# EAGLE board TSOP_AND_SOP (EAGLE 4.09)

Size 160 x 100 mm. Coordinates in mm from the lower left corner, seen from the top.
Outline: 0,0 160,0 160,100 0,100 0,0
Copper layers used: 

## Footprints (pad centres in the part's own frame; a part is rotated, then mirrored left to right if it is on the bottom)
SO08 = smd 0.6 x 2.2: 1 -1.905,-2.6; 2 -0.635,-2.6; 3 0.635,-2.6; 4 1.905,-2.6; 5 1.905,2.6; 6 0.635,2.6; 7 -0.635,2.6; 8 -1.905,2.6
SO-08M = smd 0.6 x 2.2: 1 -1.905,-3.33; 2 -0.635,-3.33; 3 0.635,-3.33; 4 1.905,-3.33; 5 1.905,3.33; 6 0.635,3.33; 7 -0.635,3.33; 8 -1.905,3.33
SO-08 = smd 0.6 x 2.2: 1 -1.905,-2.6; 2 -0.635,-2.6; 3 0.635,-2.6; 4 1.905,-2.6; 5 1.905,2.6; 6 0.635,2.6; 7 -0.635,2.6; 8 -1.905,2.6
SO8 = smd 0.6 x 2.2: 1 -1.905,-2.6; 2 -0.635,-2.6; 3 0.635,-2.6; 4 1.905,-2.6; 5 1.905,2.6; 6 0.635,2.6; 7 -0.635,2.6; 8 -1.905,2.6
SO14 = smd 0.6 x 2.2: 1 -3.81,-2.6; 2 -2.54,-2.6; 3 -1.27,-2.6; 4 0,-2.6; 5 1.27,-2.6; 6 2.54,-2.6; 7 3.81,-2.6; 8 3.81,2.6; 9 2.54,2.6; 10 1.27,2.6; 11 0,2.6; 12 -1.27,2.6; 13 -2.54,2.6; 14 -3.81,2.6
SO16 = smd 0.6 x 2.2: 1 -4.445,-2.6; 2 -3.175,-2.6; 3 -1.905,-2.6; 4 -0.635,-2.6; 5 0.635,-2.6; 6 1.905,-2.6; 7 3.175,-2.6; 8 4.445,-2.6; 9 4.445,2.6; 10 3.175,2.6; 11 1.905,2.6; 12 0.635,2.6; 13 -0.635,2.6; 14 -1.905,2.6; 15 -3.175,2.6; 16 -4.445,2.6
SO16W = smd 0.6 x 2.2: 1 -4.445,-4.6; 2 -3.175,-4.6; 3 -1.905,-4.6; 4 -0.635,-4.6; 5 0.635,-4.6; 6 1.905,-4.6; 7 3.175,-4.6; 8 4.445,-4.6; 9 4.445,4.6; 10 3.175,4.6; 11 1.905,4.6; 12 0.635,4.6; 13 -0.635,4.6; 14 -1.905,4.6; 15 -3.175,4.6; 16 -4.445,4.6
SSOP56 = smd 0.45 x 1.8: 1 -10.8,-7.55; 2 -10,-7.55; 3 -9.2,-7.55; 4 -8.4,-7.55; 5 -7.6,-7.55; 6 -6.8,-7.55; 7 -6,-7.55; 8 -5.2,-7.55; 9 -4.4,-7.55; 10 -3.6,-7.55; 11 -2.8,-7.55; 12 -2,-7.55; 13 -1.2,-7.55; 14 -0.4,-7.55; 15 0.4,-7.55; 16 1.2,-7.55; 17 2,-7.55; 18 2.8,-7.55; 19 3.6,-7.55; 20 4.4,-7.55; 21 5.2,-7.55; 22 6,-7.55; 23 6.8,-7.55; 24 7.6,-7.55; 25 8.4,-7.55; 26 9.2,-7.55; 27 10,-7.55; 28 10.8,-7.55; 29 10.8,7.55; 30 10,7.55; 31 9.2,7.55; 32 8.4,7.55; 33 7.6,7.55; 34 6.8,7.55; 35 6,7.55; 36 5.2,7.55; 37 4.4,7.55; 38 3.6,7.55; 39 2.8,7.55; 40 2,7.55; 41 1.2,7.55; 42 0.4,7.55; 43 -0.4,7.55; 44 -1.2,7.55; 45 -2,7.55; 46 -2.8,7.55; 47 -3.6,7.55; 48 -4.4,7.55; 49 -5.2,7.55; 50 -6,7.55; 51 -6.8,7.55; 52 -7.6,7.55; 53 -8.4,7.55; 54 -9.2,7.55; 55 -10,7.55; 56 -10.8,7.55
SO20W = smd 0.6 x 2.2: 1 -5.715,-4.6; 2 -4.445,-4.6; 3 -3.175,-4.6; 4 -1.905,-4.6; 5 -0.635,-4.6; 6 0.635,-4.6; 7 1.905,-4.6; 8 3.175,-4.6; 9 4.445,-4.6; 10 5.715,-4.6; 11 5.715,4.6; 12 4.445,4.6; 13 3.175,4.6; 14 1.905,4.6; 15 0.635,4.6; 16 -0.635,4.6; 17 -1.905,4.6; 18 -3.175,4.6; 19 -4.445,4.6; 20 -5.715,4.6
SO24W = smd 0.6 x 2.2: 1 -6.985,-4.6; 2 -5.715,-4.6; 3 -4.445,-4.6; 4 -3.175,-4.6; 5 -1.905,-4.6; 6 -0.635,-4.6; 7 0.635,-4.6; 8 1.905,-4.6; 9 3.175,-4.6; 10 4.445,-4.6; 11 5.715,-4.6; 12 6.985,-4.6; 13 6.985,4.6; 14 5.715,4.6; 15 4.445,4.6; 16 3.175,4.6; 17 1.905,4.6; 18 0.635,4.6; 19 -0.635,4.6; 20 -1.905,4.6; 21 -3.175,4.6; 22 -4.445,4.6; 23 -5.715,4.6; 24 -6.985,4.6
SO28W = smd 0.6 x 2.2: 1 -8.255,-4.6; 2 -6.985,-4.6; 3 -5.715,-4.6; 4 -4.445,-4.6; 5 -3.175,-4.6; 6 -1.905,-4.6; 7 -0.635,-4.6; 8 0.635,-4.6; 9 1.905,-4.6; 10 3.175,-4.6; 11 4.445,-4.6; 12 5.715,-4.6; 13 6.985,-4.6; 14 8.255,-4.6; 15 8.255,4.6; 16 6.985,4.6; 17 5.715,4.6; 18 4.445,4.6; 19 3.175,4.6; 20 1.905,4.6; 21 0.635,4.6; 22 -0.635,4.6; 23 -1.905,4.6; 24 -3.175,4.6; 25 -4.445,4.6; 26 -5.715,4.6; 27 -6.985,4.6; 28 -8.255,4.6
SO-18DW = smd 0.6 x 2.2: 1 -5.08,-4.6; 2 -3.81,-4.6; 3 -2.54,-4.6; 4 -1.27,-4.6; 5 0,-4.6; 6 1.27,-4.6; 7 2.54,-4.6; 8 3.81,-4.6; 9 5.08,-4.6; 10 5.08,4.6; 11 3.81,4.6; 12 2.54,4.6; 13 1.27,4.6; 14 0,4.6; 15 -1.27,4.6; 16 -2.54,4.6; 17 -3.81,4.6; 18 -5.08,4.6
SOP32 = smd 0.6 x 2.2: 1 -9.525,-6.4; 2 -8.255,-6.4; 3 -6.985,-6.4; 4 -5.715,-6.4; 5 -4.445,-6.4; 6 -3.175,-6.4; 7 -1.905,-6.4; 8 -0.635,-6.4; 9 0.635,-6.4; 10 1.905,-6.4; 11 3.175,-6.4; 12 4.445,-6.4; 13 5.715,-6.4; 14 6.985,-6.4; 15 8.255,-6.4; 16 9.525,-6.4; 17 9.525,6.4; 18 8.255,6.4; 19 6.985,6.4; 20 5.715,6.4; 21 4.445,6.4; 22 3.175,6.4; 23 1.905,6.4; 24 0.635,6.4; 25 -0.635,6.4; 26 -1.905,6.4; 27 -3.175,6.4; 28 -4.445,6.4; 29 -5.715,6.4; 30 -6.985,6.4; 31 -8.255,6.4; 32 -9.525,6.4
TSOP32L = smd 1.6 x 0.3: 1 -9.6,3.75; 2 -9.6,3.25; 3 -9.6,2.75; 4 -9.6,2.25; 5 -9.6,1.75; 6 -9.6,1.25; 7 -9.6,0.75; 8 -9.6,0.25; 9 -9.6,-0.25; 10 -9.6,-0.75; 11 -9.6,-1.25; 12 -9.6,-1.75; 13 -9.6,-2.25; 14 -9.6,-2.75; 15 -9.6,-3.25; 16 -9.6,-3.75; 17 9.6,-3.75; 18 9.6,-3.25; 19 9.6,-2.75; 20 9.6,-2.25; 21 9.6,-1.75; 22 9.6,-1.25; 23 9.6,-0.75; 24 9.6,-0.25; 25 9.6,0.25; 26 9.6,0.75; 27 9.6,1.25; 28 9.6,1.75; 29 9.6,2.25; 30 9.6,2.75; 31 9.6,3.25; 32 9.6,3.75
TSOP32 = smd 1.2 x 0.36: 1 -9.85,3.75; 2 -9.85,3.25; 3 -9.85,2.75; 4 -9.85,2.25; 5 -9.85,1.75; 6 -9.85,1.25; 7 -9.85,0.75; 8 -9.85,0.25; 9 -9.85,-0.25; 10 -9.85,-0.75; 11 -9.85,-1.25; 12 -9.85,-1.75; 13 -9.85,-2.25; 14 -9.85,-2.75; 15 -9.85,-3.25; 16 -9.85,-3.75; 17 9.85,-3.75; 18 9.85,-3.25; 19 9.85,-2.75; 20 9.85,-2.25; 21 9.85,-1.75; 22 9.85,-1.25; 23 9.85,-0.75; 24 9.85,-0.25; 25 9.85,0.25; 26 9.85,0.75; 27 9.85,1.25; 28 9.85,1.75; 29 9.85,2.25; 30 9.85,2.75; 31 9.85,3.25; 32 9.85,3.75
TSOP48 = smd 1.6 x 0.3: 1 -9.6,5.75; 2 -9.6,5.25; 3 -9.6,4.75; 4 -9.6,4.25; 5 -9.6,3.75; 6 -9.6,3.25; 7 -9.6,2.75; 8 -9.6,2.25; 9 -9.6,1.75; 10 -9.6,1.25; 11 -9.6,0.75; 12 -9.6,0.25; 13 -9.6,-0.25; 14 -9.6,-0.75; 15 -9.6,-1.25; 16 -9.6,-1.75; 17 -9.6,-2.25; 18 -9.6,-2.75; 19 -9.6,-3.25; 20 -9.6,-3.75; 21 -9.6,-4.25; 22 -9.6,-4.75; 23 -9.6,-5.25; 24 -9.6,-5.75; 25 9.6,-5.75; 26 9.6,-5.25; 27 9.6,-4.75; 28 9.6,-4.25; 29 9.6,-3.75; 30 9.6,-3.25; 31 9.6,-2.75; 32 9.6,-2.25; 33 9.6,-1.75; 34 9.6,-1.25; 35 9.6,-0.75; 36 9.6,-0.25; 37 9.6,0.25; 38 9.6,0.75; 39 9.6,1.25; 40 9.6,1.75; 41 9.6,2.25; 42 9.6,2.75; 43 9.6,3.25; 44 9.6,3.75; 45 9.6,4.25; 46 9.6,4.75; 47 9.6,5.25; 48 9.6,5.75
TSOP48L = smd 1.6 x 0.3: 1 -9.6,5.75; 2 -9.6,5.25; 3 -9.6,4.75; 4 -9.6,4.25; 5 -9.6,3.75; 6 -9.6,3.25; 7 -9.6,2.75; 8 -9.6,2.25; 9 -9.6,1.75; 10 -9.6,1.25; 11 -9.6,0.75; 12 -9.6,0.25; 13 -9.6,-0.25; 14 -9.6,-0.75; 15 -9.6,-1.25; 16 -9.6,-1.75; 17 -9.6,-2.25; 18 -9.6,-2.75; 19 -9.6,-3.25; 20 -9.6,-3.75; 21 -9.6,-4.25; 22 -9.6,-4.75; 23 -9.6,-5.25; 24 -9.6,-5.75; 25 9.6,-5.75; 26 9.6,-5.25; 27 9.6,-4.75; 28 9.6,-4.25; 29 9.6,-3.75; 30 9.6,-3.25; 31 9.6,-2.75; 32 9.6,-2.25; 33 9.6,-1.75; 34 9.6,-1.25; 35 9.6,-0.75; 36 9.6,-0.25; 37 9.6,0.25; 38 9.6,0.75; 39 9.6,1.25; 40 9.6,1.75; 41 9.6,2.25; 42 9.6,2.75; 43 9.6,3.25; 44 9.6,3.75; 45 9.6,4.25; 46 9.6,4.75; 47 9.6,5.25; 48 9.6,5.75
TSOP56 = smd 1.2 x 0.25: 1 -9.7,6.75; 2 -9.7,6.25; 3 -9.7,5.75; 4 -9.7,5.25; 5 -9.7,4.75; 6 -9.7,4.25; 7 -9.7,3.75; 8 -9.7,3.25; 9 -9.7,2.75; 10 -9.7,2.25; 11 -9.7,1.75; 12 -9.7,1.25; 13 -9.7,0.75; 14 -9.7,0.25; 15 -9.7,-0.25; 16 -9.7,-0.75; 17 -9.7,-1.25; 18 -9.7,-1.75; 19 -9.7,-2.25; 20 -9.7,-2.75; 21 -9.7,-3.25; 22 -9.7,-3.75; 23 -9.7,-4.25; 24 -9.7,-4.75; 25 -9.7,-5.25; 26 -9.7,-5.75; 27 -9.7,-6.25; 28 -9.7,-6.75; 29 9.7,-6.75; 30 9.7,-6.25; 31 9.7,-5.75; 32 9.7,-5.25; 33 9.7,-4.75; 34 9.7,-4.25; 35 9.7,-3.75; 36 9.7,-3.25; 37 9.7,-2.75; 38 9.7,-2.25; 39 9.7,-1.75; 40 9.7,-1.25; 41 9.7,-0.75; 42 9.7,-0.25; 43 9.7,0.25; 44 9.7,0.75; 45 9.7,1.25; 46 9.7,1.75; 47 9.7,2.25; 48 9.7,2.75; 49 9.7,3.25; 50 9.7,3.75; 51 9.7,4.25; 52 9.7,4.75; 53 9.7,5.25; 54 9.7,5.75; 55 9.7,6.25; 56 9.7,6.75
TSOP56L = smd 1.6 x 0.3: 1 -9.6,6.75; 2 -9.6,6.25; 3 -9.6,5.75; 4 -9.6,5.25; 5 -9.6,4.75; 6 -9.6,4.25; 7 -9.6,3.75; 8 -9.6,3.25; 9 -9.6,2.75; 10 -9.6,2.25; 11 -9.6,1.75; 12 -9.6,1.25; 13 -9.6,0.75; 14 -9.6,0.25; 15 -9.6,-0.25; 16 -9.6,-0.75; 17 -9.6,-1.25; 18 -9.6,-1.75; 19 -9.6,-2.25; 20 -9.6,-2.75; 21 -9.6,-3.25; 22 -9.6,-3.75; 23 -9.6,-4.25; 24 -9.6,-4.75; 25 -9.6,-5.25; 26 -9.6,-5.75; 27 -9.6,-6.25; 28 -9.6,-6.75; 29 9.6,-6.75; 30 9.6,-6.25; 31 9.6,-5.75; 32 9.6,-5.25; 33 9.6,-4.75; 34 9.6,-4.25; 35 9.6,-3.75; 36 9.6,-3.25; 37 9.6,-2.75; 38 9.6,-2.25; 39 9.6,-1.75; 40 9.6,-1.25; 41 9.6,-0.75; 42 9.6,-0.25; 43 9.6,0.25; 44 9.6,0.75; 45 9.6,1.25; 46 9.6,1.75; 47 9.6,2.25; 48 9.6,2.75; 49 9.6,3.25; 50 9.6,3.75; 51 9.6,4.25; 52 9.6,4.75; 53 9.6,5.25; 54 9.6,5.75; 55 9.6,6.25; 56 9.6,6.75
TSSOP8 = smd 0.35 x 1.2: 1 -0.975,-2.925; 2 -0.325,-2.925; 3 0.325,-2.925; 4 0.975,-2.925; 5 0.975,2.925; 6 0.325,2.925; 7 -0.325,2.925; 8 -0.975,2.925
TSSOP14 = smd 0.305 x 0.991: 1 -1.905,-2.718; 2 -1.27,-2.718; 3 -0.635,-2.718; 4 0,-2.718; 5 0.635,-2.718; 6 1.27,-2.718; 7 1.905,-2.718; 8 1.905,2.718; 9 1.27,2.718; 10 0.635,2.718; 11 0,2.718; 12 -0.635,2.718; 13 -1.27,2.718; 14 -1.905,2.718
QSOP20 = smd 0.4 x 1: 1 -2.858,-2.75; 2 -2.223,-2.75; 3 -1.588,-2.75; 4 -0.953,-2.75; 5 -0.318,-2.75; 6 0.318,-2.75; 7 0.953,-2.75; 8 1.588,-2.75; 9 2.223,-2.75; 10 2.858,-2.75; 11 2.858,2.75; 12 2.223,2.75; 13 1.588,2.75; 14 0.953,2.75; 15 0.318,2.75; 16 -0.318,2.75; 17 -0.953,2.75; 18 -1.588,2.75; 19 -2.223,2.75; 20 -2.858,2.75
TSSOP28 = smd 0.4 x 1.6: 1 -4.25,-2.9; 2 -3.6,-2.9; 3 -2.95,-2.9; 4 -2.3,-2.9; 5 -1.65,-2.9; 6 -1,-2.9; 7 -0.4,-2.9; 8 0.3,-2.9; 9 0.95,-2.9; 10 1.6,-2.9; 11 2.25,-2.9; 12 2.9,-2.9; 13 3.55,-2.9; 14 4.2,-2.9; 15 4.15,2.9; 16 3.5,2.9; 17 2.85,2.9; 18 2.2,2.9; 19 1.55,2.9; 20 0.9,2.9; 21 0.25,2.9; 22 -0.45,2.9; 23 -1.05,2.9; 24 -1.7,2.9; 25 -2.35,2.9; 26 -3,2.9; 27 -3.65,2.9; 28 -4.3,2.9
TSSOP024 = smd 0.305 x 0.991: 1 -3.493,-2.718; 2 -2.857,-2.718; 3 -2.223,-2.718; 4 -1.587,-2.718; 5 -0.953,-2.718; 6 -0.318,-2.718; 7 0.318,-2.718; 8 0.953,-2.718; 9 1.587,-2.718; 10 2.223,-2.718; 11 2.857,-2.718; 12 3.493,-2.718; 13 3.493,2.718; 14 2.857,2.718; 15 2.223,2.718; 16 1.587,2.718; 17 0.953,2.718; 18 0.318,2.718; 19 -0.318,2.718; 20 -0.953,2.718; 21 -1.587,2.718; 22 -2.223,2.718; 23 -2.857,2.718; 24 -3.493,2.718
P-TSSOP28-1 = smd 0.35 x 1.2: 1 -4.225,-2.975; 2 -3.575,-2.975; 3 -2.925,-2.975; 4 -2.275,-2.975; 5 -1.625,-2.975; 6 -0.975,-2.975; 7 -0.325,-2.975; 8 0.325,-2.975; 9 0.975,-2.975; 10 1.625,-2.975; 11 2.275,-2.975; 12 2.925,-2.975; 13 3.575,-2.975; 14 4.225,-2.975; 15 4.225,2.975; 16 3.575,2.975; 17 2.925,2.975; 18 2.275,2.975; 19 1.625,2.975; 20 0.975,2.975; 21 0.325,2.975; 22 -0.325,2.975; 23 -0.975,2.975; 24 -1.625,2.975; 25 -2.275,2.975; 26 -2.925,2.975; 27 -3.575,2.975; 28 -4.225,2.975
QSOP16 = smd 0.4 x 1: 1 -2.223,-2.75; 2 -1.588,-2.75; 3 -0.953,-2.75; 4 -0.318,-2.75; 5 0.318,-2.75; 6 0.953,-2.75; 7 1.588,-2.75; 8 2.223,-2.75; 9 2.223,2.75; 10 1.588,2.75; 11 0.953,2.75; 12 0.318,2.75; 13 -0.318,2.75; 14 -0.953,2.75; 15 -1.588,2.75; 16 -2.223,2.75
SSOP56DL = smd 0.305 x 1.397: 1 -8.572,-4.432; 2 -7.938,-4.432; 3 -7.303,-4.432; 4 -6.668,-4.432; 5 -6.032,-4.432; 6 -5.397,-4.432; 7 -4.763,-4.432; 8 -4.128,-4.432; 9 -3.493,-4.432; 10 -2.857,-4.432; 11 -2.223,-4.432; 12 -1.587,-4.432; 13 -0.953,-4.432; 14 -0.318,-4.432; 15 0.318,-4.432; 16 0.953,-4.432; 17 1.587,-4.432; 18 2.223,-4.432; 19 2.857,-4.432; 20 3.493,-4.432; 21 4.128,-4.432; 22 4.763,-4.432; 23 5.397,-4.432; 24 6.032,-4.432; 25 6.668,-4.432; 26 7.303,-4.432; 27 7.938,-4.432; 28 8.572,-4.432; 29 8.572,4.432; 30 7.938,4.432; 31 7.303,4.432; 32 6.668,4.432; 33 6.032,4.432; 34 5.397,4.432; 35 4.763,4.432; 36 4.128,4.432; 37 3.493,4.432; 38 2.857,4.432; 39 2.223,4.432; 40 1.587,4.432; 41 0.953,4.432; 42 0.318,4.432; 43 -0.318,4.432; 44 -0.953,4.432; 45 -1.587,4.432; 46 -2.223,4.432; 47 -2.857,4.432; 48 -3.493,4.432; 49 -4.128,4.432; 50 -4.763,4.432; 51 -5.397,4.432; 52 -6.032,4.432; 53 -6.668,4.432; 54 -7.303,4.432; 55 -7.938,4.432; 56 -8.572,4.432
SSOP16 = smd 0.4 x 1.2: 1 -2.275,-2.925; 2 -1.625,-2.925; 3 -0.975,-2.925; 4 -0.325,-2.925; 5 0.325,-2.925; 6 0.975,-2.925; 7 1.625,-2.925; 8 2.275,-2.925; 9 2.275,2.925; 10 1.625,2.925; 11 0.975,2.925; 12 0.325,2.925; 13 -0.325,2.925; 14 -0.975,2.925; 15 -1.625,2.925; 16 -2.275,2.925
SSOP20 = smd 0.4 x 1.5: 1 -2.925,-3.625; 2 -2.275,-3.625; 3 -1.625,-3.625; 4 -0.975,-3.625; 5 -0.325,-3.625; 6 0.325,-3.625; 7 0.975,-3.625; 8 1.625,-3.625; 9 2.275,-3.625; 10 2.925,-3.625; 11 2.925,3.625; 12 2.275,3.625; 13 1.625,3.625; 14 0.975,3.625; 15 0.325,3.625; 16 -0.325,3.625; 17 -0.975,3.625; 18 -1.625,3.625; 19 -2.275,3.625; 20 -2.925,3.625
SSOP24 = smd 0.4 x 1.2: 1 -3.575,-3.42; 2 -2.925,-3.42; 3 -2.275,-3.42; 4 -1.625,-3.42; 5 -0.975,-3.42; 6 -0.325,-3.42; 7 0.325,-3.42; 8 0.975,-3.42; 9 1.625,-3.42; 10 2.275,-3.42; 11 2.925,-3.42; 12 3.575,-3.42; 13 3.575,3.42; 14 2.925,3.42; 15 2.275,3.42; 16 1.625,3.42; 17 0.975,3.42; 18 0.325,3.42; 19 -0.325,3.42; 20 -0.975,3.42; 21 -1.625,3.42; 22 -2.275,3.42; 23 -2.925,3.42; 24 -3.575,3.42
SSOP28 = smd 0.4 x 1.5: 1 -4.225,-3.625; 2 -3.575,-3.625; 3 -2.925,-3.625; 4 -2.275,-3.625; 5 -1.625,-3.625; 6 -0.975,-3.625; 7 -0.325,-3.625; 8 0.325,-3.625; 9 0.975,-3.625; 10 1.625,-3.625; 11 2.275,-3.625; 12 2.925,-3.625; 13 3.575,-3.625; 14 4.225,-3.625; 15 4.225,3.625; 16 3.575,3.625; 17 2.925,3.625; 18 2.275,3.625; 19 1.625,3.625; 20 0.975,3.625; 21 0.325,3.625; 22 -0.325,3.625; 23 -0.975,3.625; 24 -1.625,3.625; 25 -2.275,3.625; 26 -2.925,3.625; 27 -3.575,3.625; 28 -4.225,3.625
SOJ32/4 = smd 0.635 x 1.905: 1 -8.89,-4.902; 2 -7.62,-4.902; 3 -6.35,-4.902; 4 -5.08,-4.902; 5 -3.81,-4.902; 6 -2.54,-4.902; 7 -1.27,-4.902; 8 0,-4.902; 9 1.27,-4.902; 10 2.54,-4.902; 11 3.81,-4.902; 12 5.08,-4.902; 13 6.35,-4.902; 14 7.62,-4.902; 15 8.89,-4.902; 16 10.16,-4.902; 17 10.16,5.029; 18 8.89,5.029; 19 7.62,5.029; 20 6.35,5.029; 21 5.08,5.029; 22 3.81,5.029; 23 2.54,5.029; 24 1.27,5.029; 25 0,5.029; 26 -1.27,5.029; 27 -2.54,5.029; 28 -3.81,5.029; 29 -5.08,5.029; 30 -6.35,5.029; 31 -7.62,5.029; 32 -8.89,5.029
UMAX8 = smd 0.45 x 1.2: 1 -0.975,-2.175; 2 -0.325,-2.175; 3 0.325,-2.175; 4 0.975,-2.175; 5 0.975,2.175; 6 0.325,2.175; 7 -0.325,2.175; 8 -0.975,2.175
UMAX10 = smd 0.32 x 0.9: 1 -1,-2.25; 2 -0.5,-2.25; 3 0,-2.25; 4 0.5,-2.25; 5 1,-2.25; 6 1,2.25; 7 0.5,2.25; 8 0,2.25; 9 -0.5,2.25; 10 -1,2.25

## Placement (x,y rotation side)
E$1  SO08  [SO08]  8.25,93.18 0 top
E$2  SO-08M  [SO-08M]  19.68,93.18 0 top
E$3  SO-08  [SO-08]  29.84,93.18 0 top
E$4  SO8  [SO8]  40,93.18 0 top
E$5  SO14  [SO14]  52.7,93.18 0 top
E$6  SO16  [SO16]  66.67,93.18 0 top
E$7  S016W  [SO16W]  80.64,91.91 0 top
E$8  SSOP56  [SSOP56]  125.09,20.79 0 top
E$9  SO20W  [SO20W]  109.85,91.91 0 top
E$10  SO24W  [SO24W]  127.63,91.91 0 top
E$11  SO28W  [SO28W]  147.95,91.91 0 top
E$12  SO-18DW  [SO-18DW]  94.61,91.91 0 top
E$13  SOP32  [SOP32]  38.73,69.05 0 top
E$14  TSOP32L  [TSOP32L]  92.07,69.05 0 top
E$15  TSOP32  [TSOP32]  66.67,69.05 0 top
E$16  TSOP48  [TSOP48]  117.47,69.05 0 top
E$17  TSOP48L  [TSOP48L]  146.68,69.05 0 top
E$18  TSOP56  [TSOP56]  14.6,46.19 0 top
E$19  TSOP56L  [TSOP56L]  38.73,46.19 0 top
E$20  TSSOP8  [TSSOP8]  57.78,46.19 0 top
E$21  TSSOP14  [TSSOP14]  67.94,46.19 0 top
E$22  QSOP20  [QSOP20]  128.9,46.19 0 top
E$23  TSSOP28  [TSSOP28]  80.64,46.19 0 top
E$24  TSSOP024  [TSSOP024]  93.34,46.19 0 top
E$25  P-TSSOP28-1  [P-TSSOP28-1]  106.04,46.19 0 top
E$26  QSOP16  [QSOP16]  118.74,46.19 0 top
E$27  SSOP56DL  [SSOP56DL]  95.88,20.79 0 top
E$28  SSOP16  [SSOP16]  140.33,46.19 0 top
E$29  SSOP20  [SSOP20]  151.76,46.19 0 top
E$30  SSOP24  [SSOP24]  8.25,22.06 0 top
E$31  SSOP28  [SSOP28]  19.68,22.06 0 top
E$32  SOJ32/4  [SOJ32/4]  13.33,70.32 0 top
E$35  UMAX8  [UMAX8]  59.05,20.79 0 top
E$40  UMAX10  [UMAX10]  69.21,20.79 0 top

## Library data of the parts
E$1 E$5-E$7 E$9-E$11 E$13 = smd-ipc
E$2 E$3 E$29 E$31 = microchip
E$4 E$28 E$30 = micro-philips
E$8 E$14 E$17-E$19 = micro-intel
E$12 = texas
E$15 = memory
E$16 = st-microelectronics
E$20 E$21 = linear
E$22 E$26 = zetex
E$23 = STEPPER 2
E$24 E$27 = burr-brown
E$25 = infineon
E$32 = memory-sram
E$35 E$40 = maxim